# EAGLE board custom_garden_pcb_gnd (EAGLE 6.2)
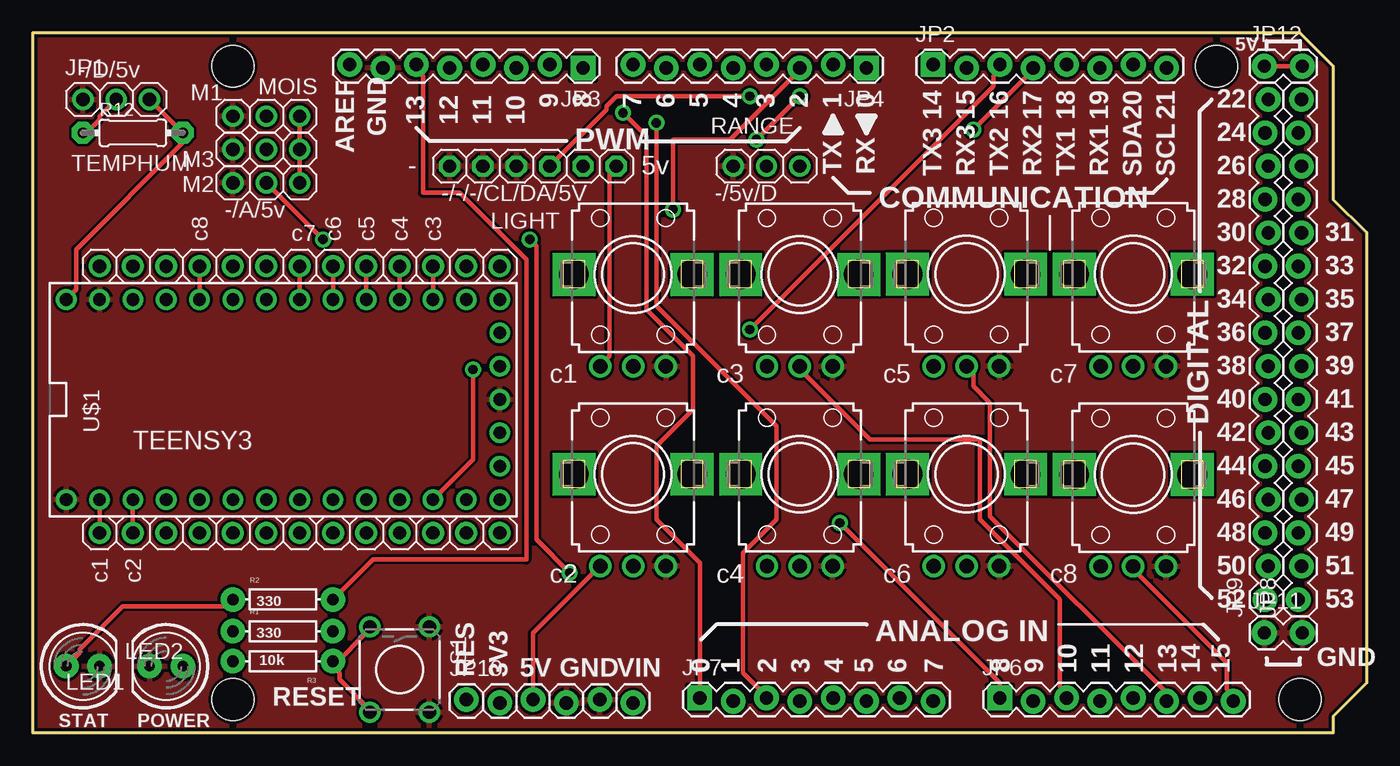
[diagram p0: board, top side]
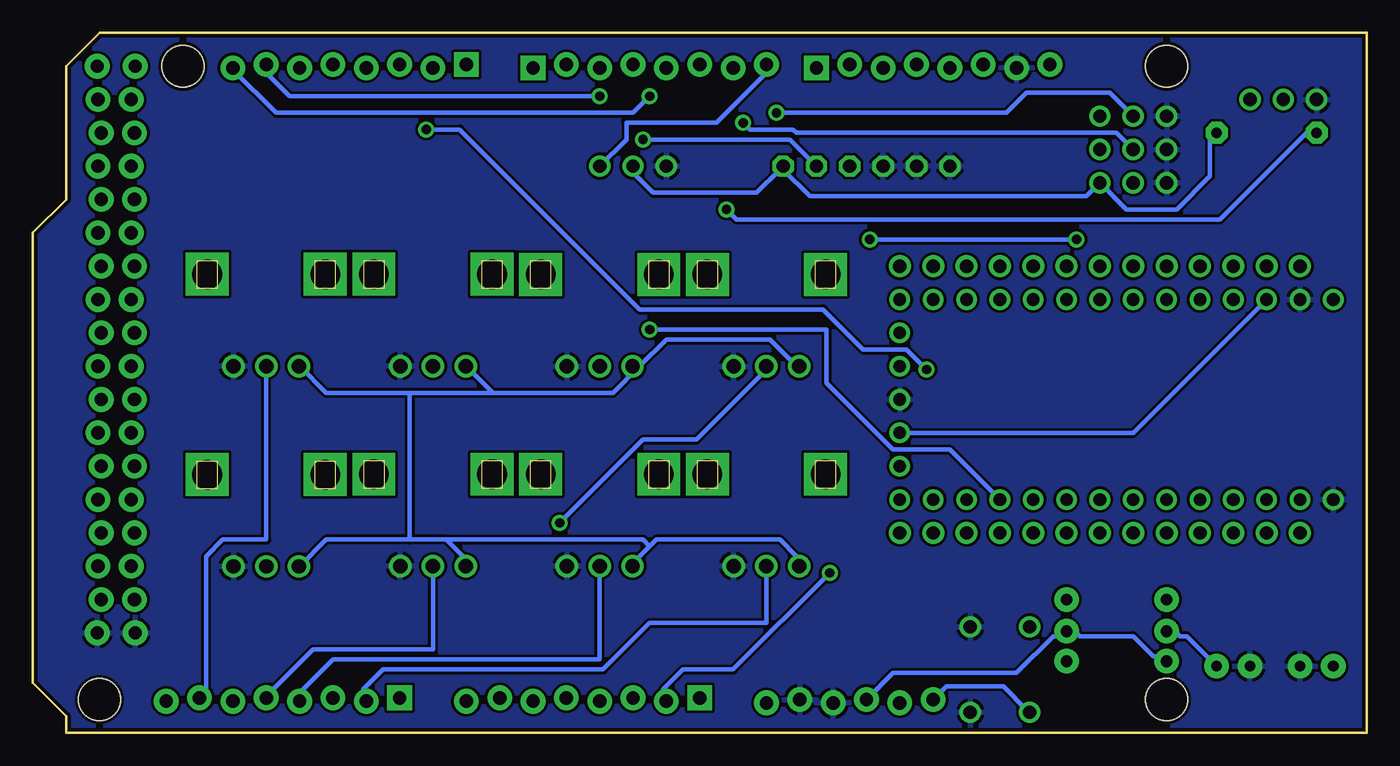
[diagram p1: board, bottom side, seen from below]

Size 101.6 x 53.34 mm. Coordinates in mm from the lower left corner, seen from the top.
Outline: 0,0 99.06,0 99.06,1.27 101.6,3.81 101.6,38.1 99.06,40.64 99.06,50.8 96.52,53.34 0,53.34 0,0
Copper layers (1*16): Top 0.035mm / dielectric 1.5mm / Bottom 0.035mm
Design rules: minimum track width 8mil, minimum drill 28mil, track to track 8mil, track to pad 8mil, pad to pad 8mil, via to via 20mil, smd to smd 8mil, copper to edge 10mil, drill to drill 8mil, minimum pad ring 12mil, minimum via ring 10mil, stop-mask expansion 4mil, vias tented up to drill 25mil, thermal gap 10mil
Net classes: 0 default: width 0.356 mm, drill 0.356 mm
Holes 3.2 mm at 15.24,50.8 15.24,2.54 90.17,50.8 96.52,2.54

## Footprints (pad centres in the part's own frame; a part is rotated, then mirrored left to right if it is on the bottom)
1X03 = drill 1.016: 1 -2.54,0; 2 0,0; 3 2.54,0
1X08_LOCK = drill 1.016 pad 1.88 square: 1 0,0.127 | drill 1.016 pad 1.88: 2 2.54,-0.127; 3 5.08,0.127; 4 7.62,-0.127; 5 10.16,0.127; 6 12.7,-0.127; 7 15.24,0.127; 8 17.78,-0.127
1X16_LOCK = drill 1.016 pad 1.88: 1 0,0.127; 2 2.54,-0.127; 3 5.08,0.127; 4 7.62,-0.127; 5 10.16,0.127; 6 12.7,-0.127; 7 15.24,0.127; 8 17.78,-0.127; 9 20.32,0.127; 10 22.86,-0.127; 11 25.4,0.127; 12 27.94,-0.127; 13 30.48,0.127; 14 33.02,-0.127; 15 35.56,0.127; 16 38.1,-0.127
1X06_LOCK = drill 1.016 pad 1.88: 1 0,0; 2 2.54,-0.254; 3 5.08,0; 4 7.62,-0.254; 5 10.16,0; 6 12.7,-0.254
1X02_LOCK = drill 1.016 pad 1.88: 1 -0.178,0; 2 2.718,0
LED5MM = drill 0.813 pad 1.88: A -1.27,0; K 1.27,0
1X06 = drill 1.016 octagon: 1 -6.35,0; 2 -3.81,0; 3 -1.27,0; 4 1.27,0; 5 3.81,0; 6 6.35,0
AXIAL-0.3 = drill 0.9 pad 1.88: P$1 -3.81,0; P$2 3.81,0
EVUF = drill 1.1 pad 1.676: 1 -2.5,-7; 2 0,-7; 3 2.5,-7 | drill 2.25 pad 2.8 square: M1 4.5,0; M2 -4.5,0
0204/7 = drill 0.813 pad 1.676 octagon: 1 -3.81,0; 2 3.81,0
TACTILE-PTH = drill 1.016: 1 -3.251,2.261; 2 3.251,2.261; 3 -3.251,-2.261; 4 3.251,-2.261
1X13-BIG = drill 1.016 pad 1.676: 1 -15.24,0; 2 -12.7,0; 3 -10.16,0; 4 -7.62,0; 5 -5.08,0; 6 -2.54,0; 7 0,0; 8 2.54,0; 9 5.08,0; 10 7.62,0; 11 10.16,0; 12 12.7,0; 13 15.24,0
TEENSY_3.0_BASIC = drill 0.965: 0 -7.62,13.97; 1 -7.62,11.43; 2 -7.62,8.89; 3 -7.62,6.35; 3.3V 7.62,11.43; 3.3V1 -2.54,-16.51; 4 -7.62,3.81; 5 -7.62,1.27; 6 -7.62,-1.27; 7 -7.62,-3.81; 8 -7.62,-6.35; 9 -7.62,-8.89; 10 -7.62,-11.43; 11 -7.62,-13.97; 12 -7.62,-16.51; 13 7.62,-16.51; 14/A0 7.62,-13.97; 15/A1 7.62,-11.43; 16/A2 7.62,-8.89; 17/A3 7.62,-6.35; 18/A4 7.62,-3.81; 19/A5 7.62,-1.27; 20/A6 7.62,1.27; 21/A7 7.62,3.81; 22/A8 7.62,6.35; 23/A9 7.62,8.89; AGND 7.62,13.97; GND -7.62,16.51; GND1 0,-16.51; PGM 2.54,-16.51; RESET 5.08,-16.51; VBAT -5.08,-16.51; VIN 7.62,16.51

## Placement (x,y rotation side)
JP1  [1X03]  6.35,48.26 0 top
JP2  [1X08_LOCK]  68.58,50.8 0 top
JP3  [1X08_LOCK]  41.91,50.8 180 top
JP4  [1X08_LOCK]  63.5,50.8 180 top
JP6  [1X08_LOCK]  73.66,2.54 0 top
JP7  [1X08_LOCK]  50.8,2.54 0 top
JP8  M16LOCK  [1X16_LOCK]  96.52,10.16 90 top
JP9  M16LOCK  [1X16_LOCK]  93.98,10.16 90 top
JP10  [1X06_LOCK]  33.02,2.54 0 top
JP11  [1X02_LOCK]  93.98,7.62 0 top
JP12  [1X02_LOCK]  93.98,50.8 0 top
LED1  Red  [LED5MM]  10.16,5.08 180 top
LED2  Green  [LED5MM]  3.81,5.08 0 top
LIGHT  [1X06]  38.1,43.18 0 top
M1  [1X03]  17.78,46.99 0 top
M2  [1X03]  17.78,41.91 0 top
M3  [1X03]  17.78,44.45 0 top
R1  330  [AXIAL-0.3]  19.05,7.75 0 top
R2  330  [AXIAL-0.3]  19.05,10.16 0 top
R3  10k  [AXIAL-0.3]  19.05,5.46 180 top
R4  EVUF2A  [EVUF]  83.82,19.68 0 top
R5  EVUF2A  [EVUF]  83.82,34.95 0 top
R6  EVUF2A  [EVUF]  71.12,34.95 0 top
R7  EVUF2A  [EVUF]  71.12,19.71 0 top
R8  EVUF2A  [EVUF]  58.42,19.71 0 top
R9  EVUF2A  [EVUF]  58.42,34.92 0 top
R10  EVUF2A  [EVUF]  45.72,34.92 0 top
R11  EVUF2A  [EVUF]  45.72,19.71 0 top
R12  [0204/7]  7.62,45.72 0 top
RANGE  [1X03]  55.88,43.18 0 top
S1  [TACTILE-PTH]  27.94,4.83 270 top
TEENSY_0TO12  [1X13-BIG]  20.32,15.24 0 top
TEENSY_13UP  [1X13-BIG]  20.32,35.56 0 top
U$1  TEENSY_3.0_BASIC  [TEENSY_3.0_BASIC]  19.05,25.4 90 top

## Library data of the parts
JP1 LIGHT M1-M3 R12 RANGE TEENSY_0TO12 TEENSY_13UP = adafruit
JP2-JP4 JP6-JP12 LED1 LED2 R1-R3 S1 = SparkFun
R4-R11 = pot
U$1 = Teensy3.0

## Nets
3.3: JP10.2
3.3V: U$1.3.3V U$1.3.3V1
5V: JP1.3 JP10.3 LIGHT.6 M1.3 M2.3 M3.3 R1.P$2 R3.P$2 R4.1 R5.1 R6.1 R7.1 R8.1 R9.1 R10.1 R11.1 R12.2 RANGE.2 U$1.VIN
5V@1: JP12.1 JP12.2
A0: JP7.1 M1.2
A1: JP7.2 M2.2
A2: JP7.3 M3.2
A3: JP7.4
A4: JP7.5
A5: JP7.6
A6: JP7.7
A7: JP7.8
A8: JP6.1 R10.2
A9: JP6.2 R11.2
A10: JP6.3 R9.2
A11: JP6.4 R8.2
A12: JP6.5 R7.2
A13: JP6.6 R6.2
A14: JP6.7 R5.2
A15: JP6.8 R4.2
AREF: JP3.8
D2: JP1.2 JP4.3 R12.1
D3: JP4.4
D4: JP4.5
D5: JP4.6
D6: JP4.7
D7: JP4.8 RANGE.3
D8: JP3.1
D9: JP3.2
D10: JP3.3
D11: JP3.4
D12: JP3.5
D13: JP3.6 R2.P$2
D14: JP2.1
D15: JP2.2
D16: JP2.3 U$1.9
D17: JP2.4 U$1.10
D18: JP2.5
D19: JP2.6
D22: JP9.1
D23: JP8.16
D24: JP9.2
D25: JP8.15
D26: JP9.3
D27: JP8.14
D28: JP9.4
D29: JP8.13
D30: JP9.5
D31: JP8.12
D32: JP9.6
D33: JP8.11
D34: JP9.7
D35: JP8.10
D36: JP9.8
D37: JP8.9
D38: JP9.9
D39: JP8.8
D40: JP9.10
D41: JP8.7
D42: JP9.11
D43: JP8.6
D44: JP9.12
D45: JP8.5
D46: JP9.13
D47: JP8.4
D48: JP9.14
D49: JP8.3
D50: JP9.15
D51: JP8.2
D52: JP9.16
D53: JP8.1
GND: JP1.1 JP3.7 JP10.4 JP10.5 JP11.1 JP11.2 LED1.K LED2.K LIGHT.1 LIGHT.2 LIGHT.3 M1.1 M2.1 M3.1 R4.3 R5.3 R6.3 R7.3 R8.3 R9.3 R10.3 R11.3 RANGE.1 S1.1 S1.2 U$1.AGND U$1.GND U$1.GND1
N$126: LED1.A R1.P$1
N$127: LED2.A R2.P$1
RES: JP10.1 R3.P$1 S1.3 S1.4
RX0: JP4.1
SCL: JP2.8 LIGHT.4
SDA: JP2.7 LIGHT.5
TOUCH0: TEENSY_0TO12.1 U$1.0
TOUCH1: TEENSY_0TO12.2 U$1.1
TOUCH15: TEENSY_13UP.11 U$1.15/A1
TOUCH16: TEENSY_13UP.10 U$1.16/A2
TOUCH17: TEENSY_13UP.9 U$1.17/A3
TOUCH18: TEENSY_13UP.8 U$1.18/A4
TOUCH19: TEENSY_13UP.7 U$1.19/A5
TOUCH20: TEENSY_13UP.4 U$1.22/A8
TX1: JP4.2
VBAT: U$1.VBAT
VIN: JP10.6

## Tracks (layer width: path | path; a pad name or v marks a point on that pad's centre or on a via)
3.3V
  Bottom 0.356: U$1.3.3V 17.78,22.86 U$1.3.3V1
5V
  Top 0.356: JP10.3 38.1,7.62 43.18,12.7 R11.1 | M2.3 M3.3 M1.3 | U$1.VIN 3.3,33.78 3.3,36.83 11.43,44.96 R12.2 JP1.3 | LIGHT.6 43.94,42.67 43.94,28.7 43.43,28.19 43.43,27.94 R10.1
  Bottom 0.356: 22.86,7.62 22.1,7.62 21.84,7.37 17.78,7.37 16.26,5.84 15.49,5.84 15.24,5.59 R3.P$2 | 54.61,14.22 54.1,14.73 44.7,14.73 43.43,13.46 43.43,12.95 R11.1 | 54.61,14.22 55.88,12.95 R8.1 | 22.86,7.62 23.11,7.37 23.88,7.37 26.67,4.57 36.07,4.57 JP10.3 | 22.86,7.62 R1.P$2 | R12.2 11.94,45.72 11.94,42.42 14.48,39.88 18.29,39.88 M2.3 21.34,40.89 42.42,40.89 44.45,42.93 44.7,42.93 | 70.1,14.73 72.9,14.73 | 72.9,14.73 79.25,14.73 81.28,12.7 R4.1 | 70.1,14.73 68.83,13.46 68.83,12.95 R7.1 | 44.7,42.93 46.48,41.15 54.36,41.15 55.88,42.67 RANGE.2 | 55.37,27.94 53.34,29.97 45.47,29.97 43.43,27.94 R10.1 | 55.37,27.94 55.88,27.94 R9.1 55.37,27.94 | 66.55,25.91 68.58,27.94 R6.1 | 66.55,25.91 57.4,25.91 55.37,27.94 | 66.55,25.91 72.9,25.91 | 72.9,25.91 79.25,25.91 81.28,27.94 R5.1 | 72.9,25.91 72.9,14.73 | 44.7,42.93 LIGHT.6 | 54.61,14.22 55.12,14.73 70.1,14.73
5V@1
  Top 0.356: JP12.2 JP12.1
A0  (via drill 0.71)
  Top 0.356: v44.96,47.24 46.74,45.47 46.74,32.26 50.29,28.7 50.29,24.64 47.5,21.84 47.5,16.26 50.8,12.95 JP7.1
  Bottom 0.356: M1.2 19.56,48.77 25.91,48.77 27.43,47.24 v44.96,47.24
A1  (via drill 0.71)
  Top 0.356: v22.1,37.59 M2.2 | v37.85,37.59 38.35,37.08 38.35,14.73 v40.89,12.19
  Bottom 0.356: v37.85,37.59 v22.1,37.59 | v40.89,12.19 48.26,4.83 52.07,4.83 53.59,3.3 53.59,2.54 53.34,2.54 JP7.2
A2  (via drill 0.71)
  Top 0.356: v47.5,46.48 47.5,32.51 56.64,23.37 56.64,16.26 54.1,13.72 54.1,4.57 55.88,2.79 JP7.3
  Bottom 0.356: M3.2 19.05,45.72 43.43,45.72 43.69,45.97 46.99,45.97 v47.5,46.48
A8  (via drill 0.71)
  Top 0.356: v61.47,16 73.66,3.81 JP6.1
  Bottom 0.356: v61.47,16 55.12,22.35 51.05,22.35 45.72,27.69 R10.2
A9
  Bottom 0.356: R11.2 45.72,8.38 54.61,8.38 58.17,4.83 74.93,4.83 76.45,3.3 76.45,2.54 76.2,2.54 JP6.2
A10
  Top 0.356: JP6.3 78.74,3.05 78.23,3.56 78.23,10.16 72.14,16.26 72.14,22.35 63.75,22.35 58.42,27.69 R9.2
A11
  Bottom 0.356: R8.2 58.42,5.59 78.74,5.59 81.28,3.05 JP6.4
A12
  Bottom 0.356: R7.2 71.12,6.35 80.26,6.35 83.82,2.79 JP6.5
A13
  Top 0.356: JP6.6 86.36,3.05 72.9,16.51 72.9,25.15 71.63,26.42 71.63,27.43 R6.2
A14
  Bottom 0.356: R5.2 83.82,14.73 87.12,14.73 88.39,13.46 88.39,2.79 88.9,2.79 JP6.7
A15
  Top 0.356: JP6.8 91.44,2.79 90.93,3.3 90.93,5.33 83.82,12.45 R4.2
D2  (via drill 0.71)
  Top 0.356: JP1.2 5.08,46.99 5.08,46.74 4.06,45.72 R12.1 | v48.77,39.88 48.77,45.21 53.09,45.21 58.42,50.55 JP4.3
  Bottom 0.356: v48.77,39.88 48.01,39.12 11.18,39.12 4.57,45.72 R12.1
D7
  Bottom 0.356: RANGE.3 56.39,45.21 56.39,46.48 49.53,46.48 45.72,50.29 JP4.8
D13
  Top 0.356: R2.P$2 25.91,13.21 37.59,13.21 37.59,36.07 32.51,41.15 29.72,41.15 29.72,50.04 29.21,50.55 JP3.6
D16  (via drill 0.71)
  Top 0.356: v54.61,30.73 73.15,49.28 73.15,50.04 73.66,50.55 JP2.3
  Bottom 0.356: U$1.9 31.75,21.59 36.07,21.59 41.15,26.67 41.15,30.73 v54.61,30.73
D17  (via drill 0.71)
  Top 0.356: U$1.10 33.53,20.83 v33.53,27.69 | v71.63,45.97 76.2,50.55 JP2.4
  Bottom 0.356: v33.53,27.69 35.05,29.21 38.35,29.21 41.4,32.26 55.37,32.26 69.09,45.97 v71.63,45.97
GND
  pour Bottom: 0,53.34 0,0 102.87,0 102.87,53.34
  pour Top: 0,53.34 102.87,53.34 102.87,0 0,0
N$126
  Bottom 0.356: LED1.A 13.72,7.37 14.22,7.37 14.48,7.62 15.24,7.62 R1.P$1
N$127
  Top 0.356: LED2.A 3.56,6.1 3.56,6.35 6.86,9.65 15.24,9.65 R2.P$1
RES
  Top 0.356: 22.86,5.08 23.37,4.57 23.37,4.06 25.65,1.78 S1.4 | 22.86,5.08 R3.P$1 22.86,5.33 | 22.86,5.08 25.65,7.87 S1.3
  Bottom 0.356: JP10.1 32,3.56 27.69,3.56 25.91,1.78 S1.4
SCL  (via drill 0.71)
  Top 0.356: LIGHT.4 43.69,47.5 43.69,47.75 44.45,48.51 v54.61,48.51
  Bottom 0.356: v54.61,48.51 55.88,47.24 83.06,47.24 86.36,50.55 JP2.8
SDA  (via drill 0.71)
  Top 0.356: v58.42,48.51 v55.12,45.21
  Bottom 0.356: LIGHT.5 43.94,45.21 v55.12,45.21 | v58.42,48.51 82.04,48.51 83.82,50.29 JP2.7
TOUCH0
  Top 0.356: TEENSY_0TO12.1 U$1.0
TOUCH1
  Top 0.356: TEENSY_0TO12.2 U$1.1
TOUCH15
  Top 0.356: TEENSY_13UP.11 U$1.15/A1
TOUCH16
  Top 0.356: TEENSY_13UP.10 U$1.16/A2
TOUCH17
  Top 0.356: TEENSY_13UP.9 U$1.17/A3
TOUCH18
  Top 0.356: TEENSY_13UP.8 U$1.18/A4
TOUCH19
  Top 0.356: TEENSY_13UP.7 U$1.19/A5
TOUCH20
  Top 0.356: TEENSY_13UP.4 U$1.22/A8

## Text on the board
tPlace: 5V | -/D/5v | MOIS | 9 | 8 | 7 | 6 | 5 | 4 | 3 | 2 | 1 | 0 | 22 | 14 | 15 | 16 | 17 | 18 | 19 | 20 | 21 | 13 | 12 | 11 | 10 | GND | 24 | AREF | PWM | TEMPHUM | TX | RX | 26 | TX3 | RX3 | TX2 | RX2 | TX1 | RX1 | SDA | SCL | -/-/-/CL/DA/5V | -/5v/D | COMMUNICATION | 28 | -/A/5v | c8 | c7 | c6 | c5 | c4 | c3 | 30 | 31 | 32 | 33 | 34 | 35 | 36 | 37 | c1 | c3 | c5 | c7 | 38 | 39 | 40 | 41 | DIGITAL | TEENSY3 | 42 | 43 | 44 | 45 | 46 | 47 | 48 | 49 | 50 | 51 | c1 | c2 | c2 | c4 | c6 | c8 | 52 | 53 | ANALOG IN | 0 | 1 | 2 | 3 | 4 | 5 | 6 | 7 | 8 | 9 | 10 | 11 | 12 | 13 | 14 | 15 | GND | RES | 3V3 | 5V | GND | VIN | RESET | STAT | POWER
tNames: - | 5v